# Altium PCB pb-autoreverse.PcbDoc
Units mm, origin at the board's own origin, x right, y up, seen from the top; angles counter-clockwise.
Board outline 57.15 x 52.7 mm, 2 copper layers (Top Layer, Bottom Layer); 18 components, 15 nets, 62 pads, 0 vias.
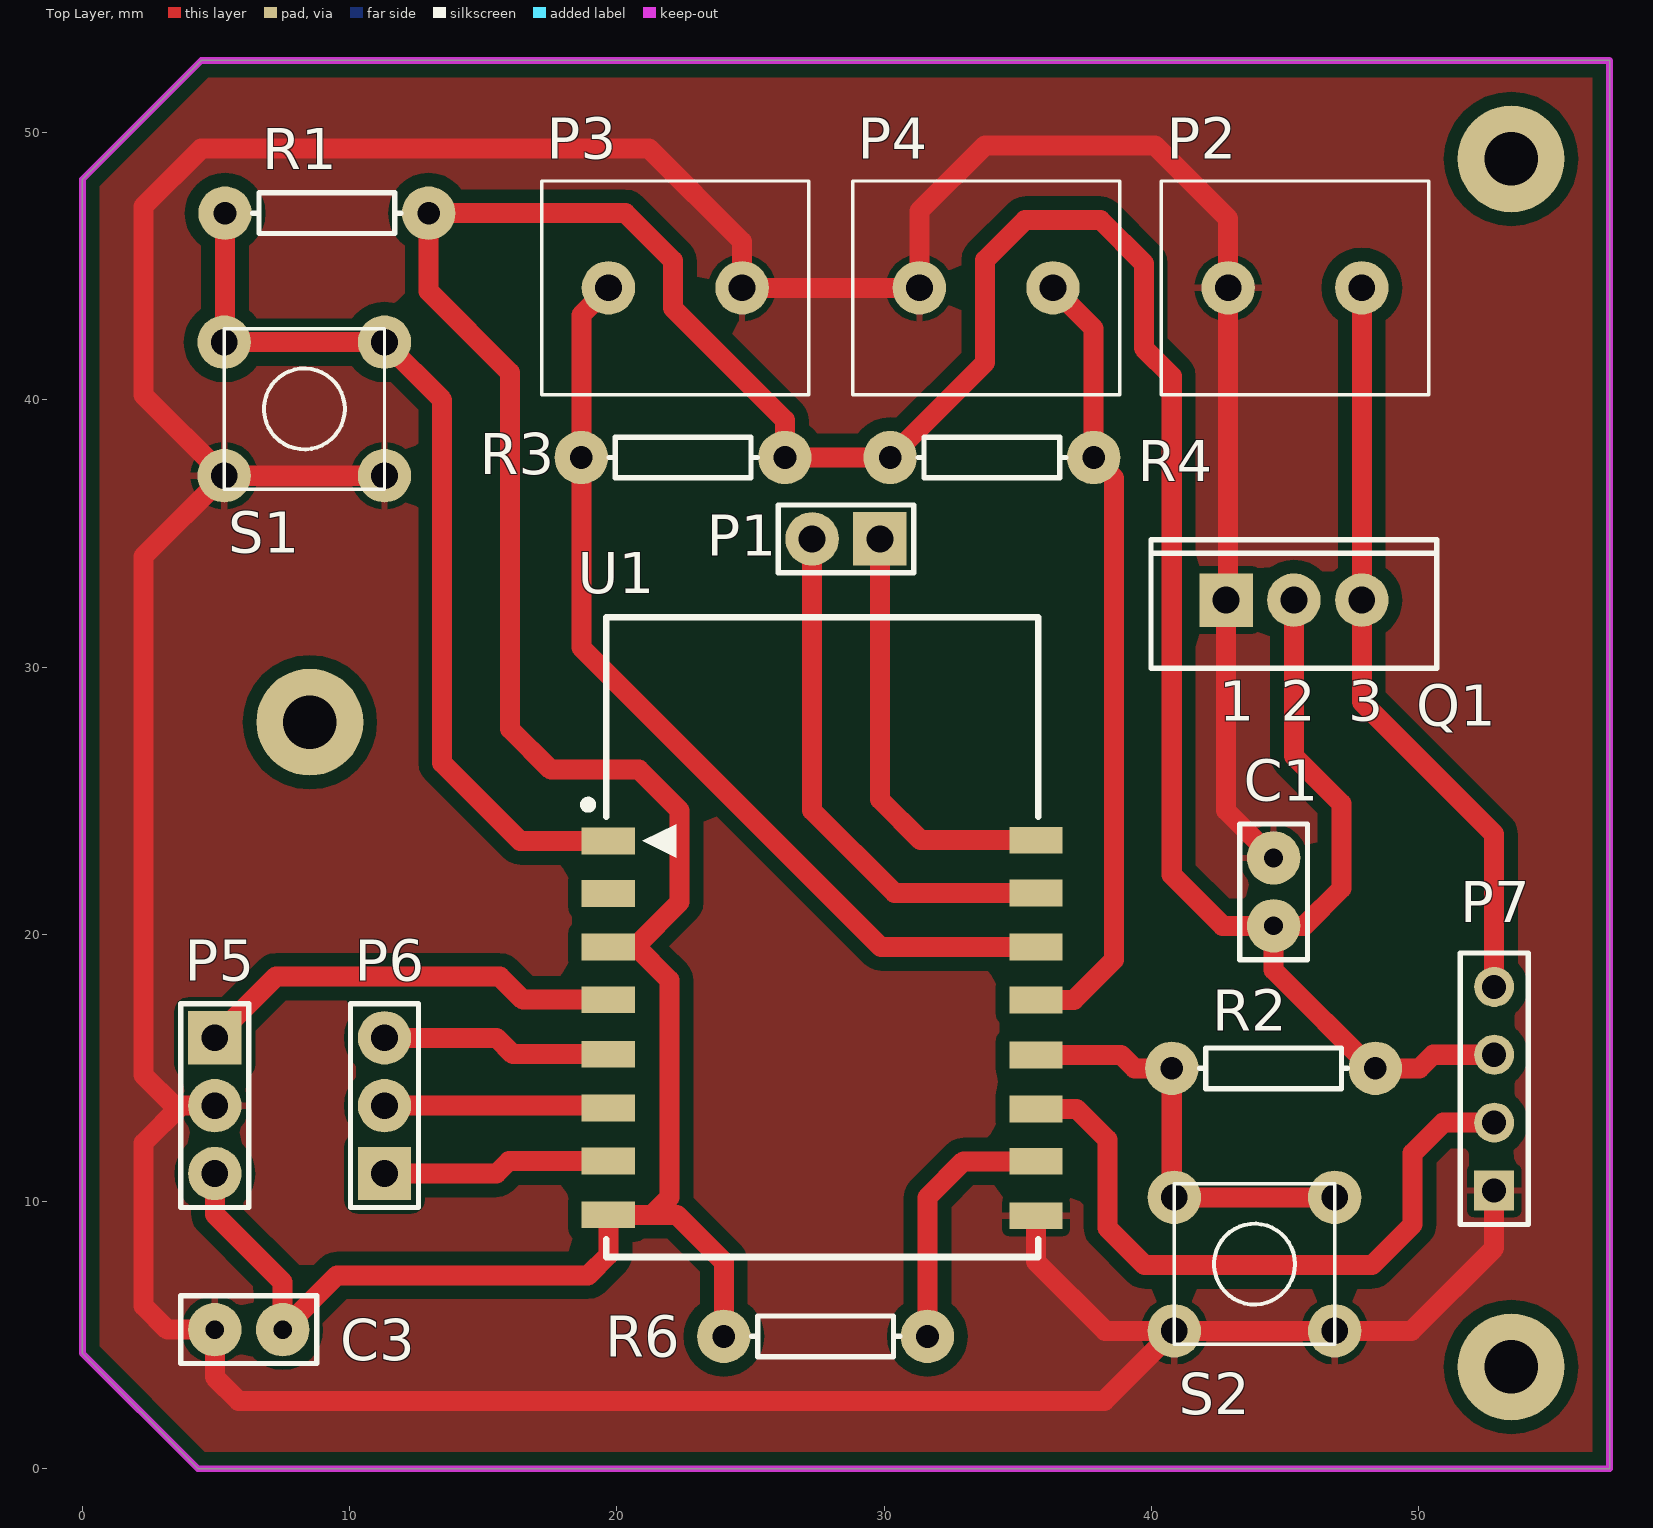
[diagram p0: Top Layer view]
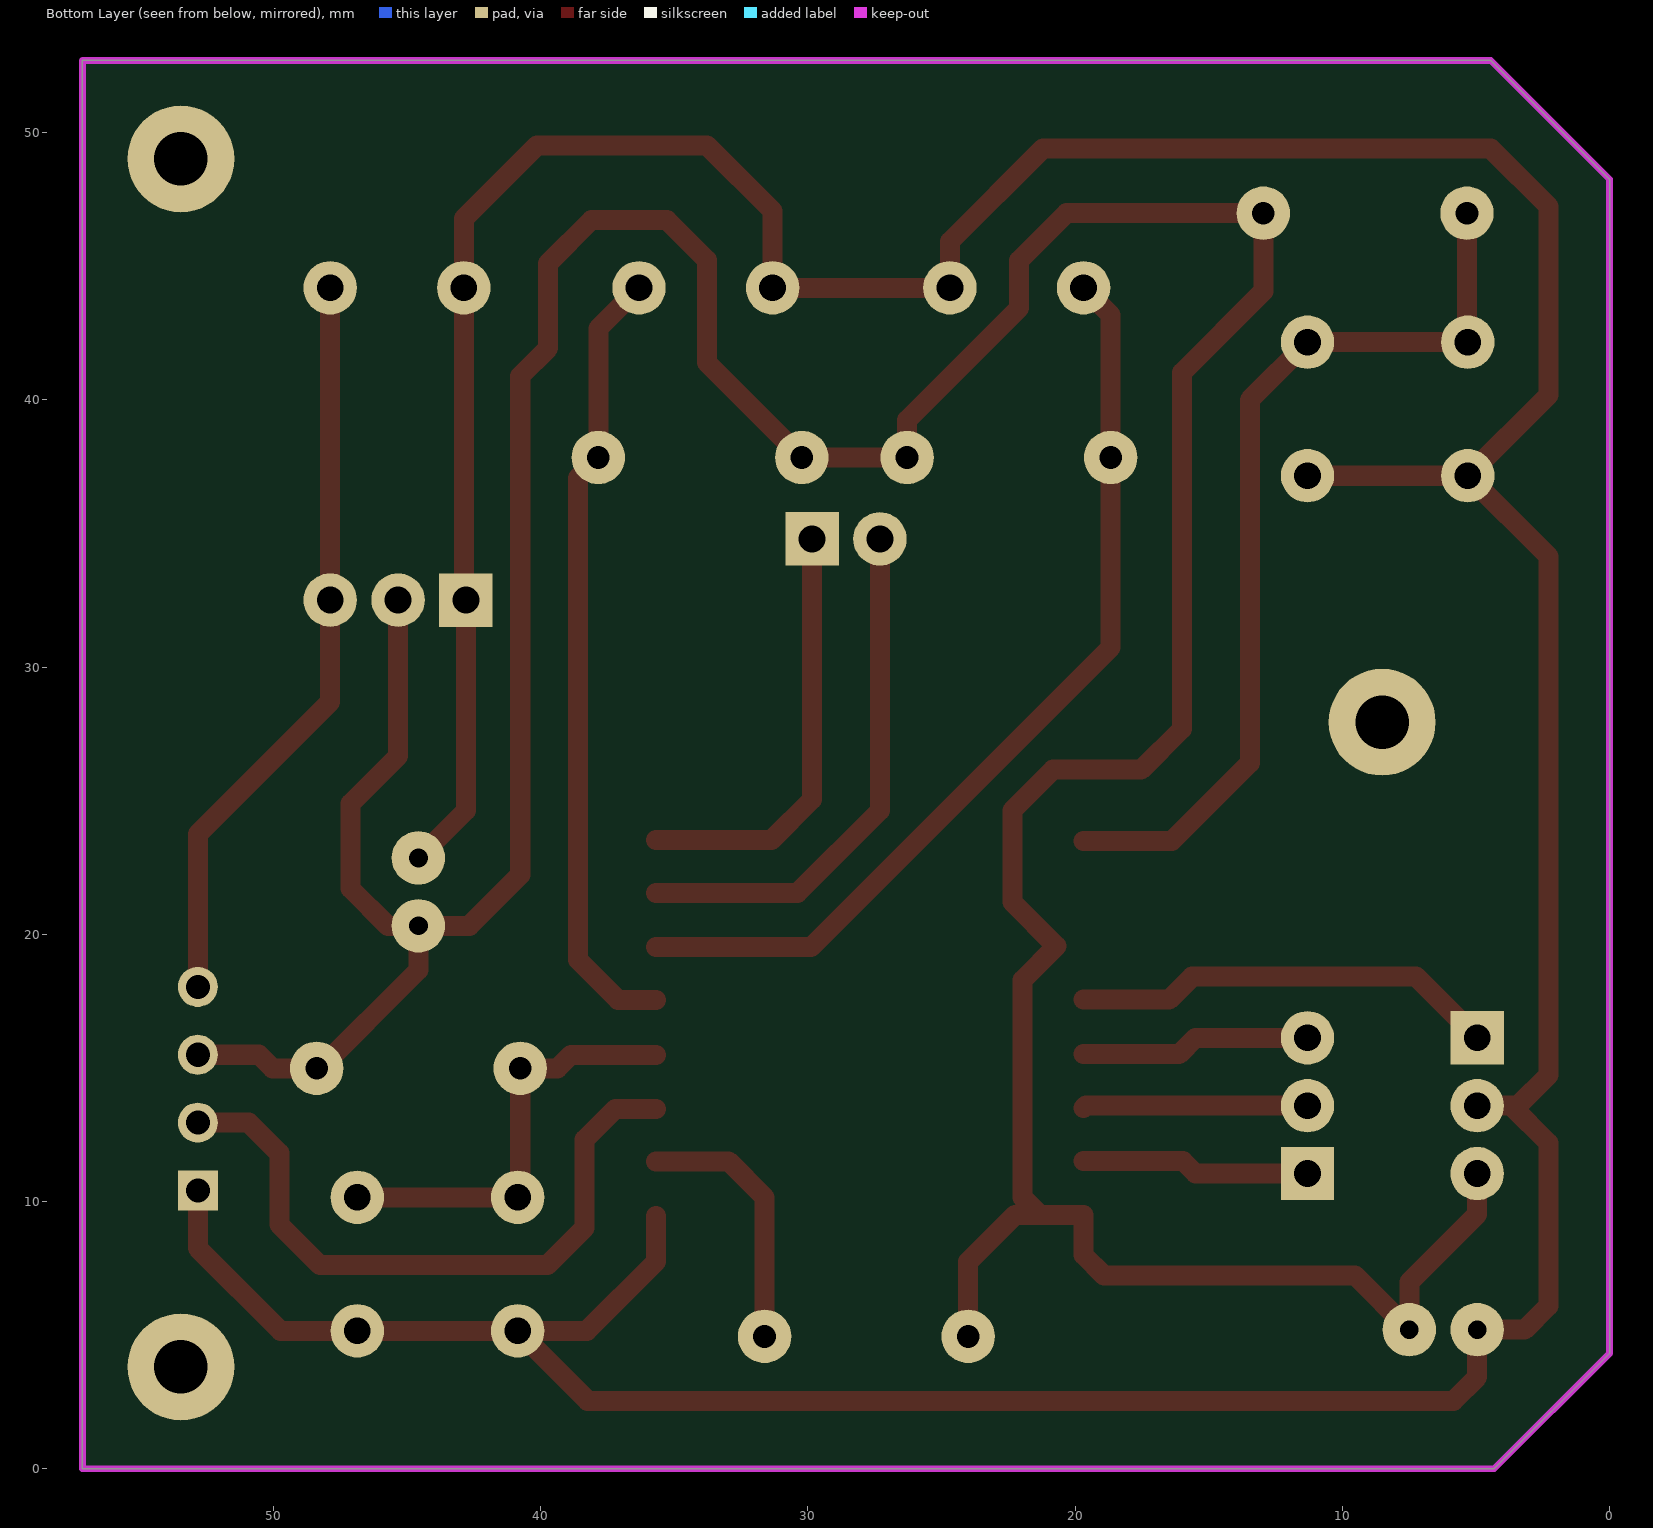
[diagram p1: Bottom Layer view, seen from below]

## Layer stack, top to bottom
Top Solder: solder mask 0.0102, Solder Resist, Dk 3.5
Top Layer: signal copper 0.0356
Dielectric 1: dielectric 0.32, FR-4, Dk 4.8
Bottom Layer: signal copper 0.0356
Bottom Solder: solder mask 0.0102, Solder Resist, Dk 3.5

## Board outline
0,4.318 4.318,0 57.15,0 57.15,52.705 4.445,52.705 0,48.26

## Design rules (kind name [scope] priority, off if disabled: settings)
Clearance [All] p1: gap=0.5 ignorepadtopadclearanceinfootprint=FALSE
PolygonConnect [All] p1: connectstyle=Relief reliefconductorwidth=0.254 reliefentries=4 polygonreliefangle="90 Angle" airgapwidth=0.254
RoutingLayers [All] p1: top layer_v5=TRUE bottom layer_v5=FALSE
RoutingVias [All] p1: holewidth=0.711 width=1.27 viastyle="Through Hole" minholewidth=0.711 minwidth=1.27 maxholewidth=0.711 maxwidth=1.27
SolderMaskExpansion [All] p1: expansion=0.102
Width [All] p1: maxlimit=1 minlimit=0.5 preferedwidth=0.75
29 further rules are at their usual default settings.

## Components (designator, comment, footprint, x,y, rotation, side; value= is the part's Value field where it differs from the comment)
C1 "100nf" RAD-0.1 44.577,21.59 r270 top value=100nF
C3 "100nf" RAD-0.1 6.223,5.207 r180 top value=100nF
P1 "Header 2" HDR1X2 29.845,34.798 r180 top
P2 "Power input" ScrewTerminal-X2 50.379,48.196 r180 top
P3 "Pwr switch" ScrewTerminal-X2 17.185,40.196 r0 top
P4 "Bwd switch" ScrewTerminal-X2 38.822,48.196 r180 top
P5 "Sensor" HDR1X3 4.953,16.129 r270 top
P6 "IO Export" HDR1X3 11.303,11.049 r90 top
P7 "Header 4" HDR1X4 52.832,10.414 r90 top
Q1 "Regulador 3.3V" TO-220-AB 45.339,32.512 r0 top
R1 "10K" AXIAL-0.3 9.144,46.99 r180 top
R2 "10K" AXIAL-0.3 44.577,14.986 r0 top
R3 "10K" AXIAL-0.3 22.479,37.846 r0 top
R4 "10K" AXIAL-0.3 34.036,37.846 r180 top
R6 "10K" AXIAL-0.3 27.813,4.953 r0 top
S1 "RST" PushButton 5.303,42.664 r270 top
S2 "RST" PushButton 46.863,4.66 r90 top
U1 "ESP-12e" ESP_12 19.685,23.495 r0 top

## Footprints (in the part's own frame and the unit in brackets; to place one, negate y for a bottom-side part, rotate by r counter-clockwise, add the part's x,y. Pads: shape width x height; smd on the part's side, far side on the other; paste and mask are expansions set on the pad)
AXIAL-0.3 [mm] "Axial Device, Thru-Hole; 2 Leads; 0.3 in Pin Spacing"
  round 2 hole 0.85: 1(-3.81,0) 2(3.81,0)
  silkscreen extent -2.77,-0.76 2.77,0.76
ESP_12 [mm]
  rect 2x1 smd: 1(0,0) 2(0,-1.97) 3(0,-3.97) 4(0,-5.94) 5(0,-7.98) 6(0,-9.99) 7(0,-11.98) 8(0,-13.99) 9(16,-14.03) 10(16,-11.99) 11(16,-10.03) 12(16,-8.01) 13(16,-5.95) 14(16,-3.97) 15(16,-1.95) 16(16,0.03)
  silkscreen extent -0.91,-15.57 16.08,8.37
HDR1X2 [mm] "Connector; Header; 2 Position"
  rect 2x2 hole 1: 1(0,0)
  round 2 hole 1: 2(2.54,0)
  silkscreen extent -1.27,-1.27 3.81,1.27
HDR1X3 [mm] "Connector; Header; 3 Position"
  rect 2x2 hole 1: 1(0,0)
  round 2 hole 1: 2(2.54,0) 3(5.08,0)
  silkscreen extent -1.27,-1.27 6.35,1.27
HDR1X4 [mm] "Connector; Header; 4 Position"
  rect 1.5x1.5 hole 0.9: 1(0,0)
  round 1.5 hole 0.9: 2(2.54,0) 3(5.08,0) 4(7.62,0)
  silkscreen extent -1.27,-1.27 8.89,1.27
PushButton [mm]
  round 2 hole 1: 1(0.5,6) 2(5.5,6) 3(0.5,0) 4(5.5,0)
  silkscreen extent 0,0 6,6
RAD-0.1 [mm] "Radial Cap, Thru-Hole; 2 Leads; 0.1 in Pin Spacing"
  round 2 hole 0.7: 1(-1.27,0) 2(1.27,0)
  silkscreen extent -2.54,-1.27 2.54,1.27
ScrewTerminal-X2 [mm]
  round 2 hole 1: 1(2.5,4) 2(7.5,4)
  silkscreen extent 0,0 10,8
TO-220-AB [mm] "TO, Thru-Hole, Vertical, Heatsink Mounted; 3 In-Line Leads; Pitch 2.54 mm"
  rect 2x2 hole 1: 1(-2.54,0)
  round 2 hole 1: 2(0,0) 3(2.54,0)
  silkscreen extent -5.35,-2.55 5.35,2.25

## Part data
C1 C3: library part Cap, "Capacitor", LatestRevisionDate=17-Jul-2002, LatestRevisionNote="Re-released for DXP Platform.", PackageDescription="Radial Cap, Thru-Hole; 2 Leads; 0.3 in Pin Spacing", PackageReference=RAD-0.3, Published=8-Jun-2000, Publisher="Altium Limited"
P1: "Header, 2-Pin", LatestRevisionDate=17-Jul-2002, LatestRevisionNote="Re-released for DXP Platform.", Publisher="Altium Limited"
P2 P3 P4: library part ScrewTerminal
P5 P6: library part "Header 3", "Header, 3-Pin", LatestRevisionDate=17-Jul-2002, LatestRevisionNote="Re-released for DXP Platform.", Publisher="Altium Limited"
P7: "Header, 4-Pin", LatestRevisionDate=17-Jul-2002, LatestRevisionNote="Re-released for DXP Platform.", Publisher="Altium Limited"
Q1: library part AMS1117
R1 R2 R3 R4 R6: library part Res1, "Resistor", LatestRevisionDate=17-Jul-2002, LatestRevisionNote="Re-released for DXP Platform.", PackageDescription="Axial Device, Thru-Hole; 2 Leads; 0.3 in Pin Spacing", PackageReference=AXIAL-0.3, Published=8-Jun-2000, Publisher="Altium Limited"
S1 S2: library part IT-2175, "Tactile Switch, DPST; Thru-Hole; Vertical; Rating DC 12V, 50mA (max)", PackageDocument=Rev.0, ComponentLink1Description="Manufacturer Link", ComponentLink1URL=http://www.ilswitch.com/, ComponentLink2Description="Device Overview", ComponentLink2URL=http://www.ilswitch.com/list.php?ac_id=010112&ai_id=91, DatasheetDocument=Rev.0, PackageReference=IT-2175, Published=6-Jun-2005, Publisher="Altium Limited"
U1: library part ESP-12

## Free pads (board coordinates)
  round 4 hole 2: 2(8.509,27.94) 2(53.467,3.81) 2(53.467,49.022)

## Nets (pads, with @x,y where several pads share a name; then routed paths per layer and width w, separated by ;. In a path a pad name is that pad's centre, name@x,y a point inside that pad or via, vN(x,y) a via of type N, cw(c..) or ccw(c..) an arc to the next point about the centre after c; other vN are vias at no path point)
+3.3VDC: C1.2 C3.1 P5.3 P7.3 Q1.2 R1.1 R2.2 R3.2 R4.2 R6.1 U1.3 U1.8 | length 167.7
  Top Layer w0.75: P5.3 4.953,9.525 7.493,6.985 C3.1 9.525,7.239 18.923,7.239 19.685,8.001 U1.8 21.316,9.505 ; R6.1 24.003,7.747 22.245,9.505 21.316,9.505 ; Q1.2 45.339,26.67 47.117,24.892 47.117,21.717 45.72,20.32 C1.2 ; R2.2@48.387,14.859 44.577,18.669 C1.2 ; R2.2 50.038,14.986 50.546,15.494 P7.3 ; 21.316,9.505 21.971,10.16 21.971,18.288 20.701,19.558 22.352,21.209 22.352,24.638 20.828,26.162 17.526,26.162 16.002,27.686 16.002,41.021 12.954,44.069 R1.1 20.32,46.99 22.098,45.212 22.098,43.434 26.289,39.243 R3.2 R4.2 33.782,41.402 33.782,45.236 35.282,46.736 38.1,46.736 39.721,45.115 39.721,41.94 40.767,40.894 40.767,22.225 42.672,20.32 C1.2
+5VDC: P2.1 P7.4 Q1.3 | length 28.2
  Top Layer w0.75: P2.1 Q1.3 47.879,28.702 52.832,23.749 P7.4
GND: C1.1 C3.2 P2.2 P3.2 P4.2 P5.2 P7.1 Q1.1 S1.2 S1.4 S2.1 S2.3 U1.9 | length 192.2
  Top Layer w0.75: P5.2 3.683,13.589 ; S1.2 S1.4 ; U1.9 35.685,7.749 38.274,5.16 S2.1 ; C1.1 42.799,24.638 Q1.1 42.879,32.592 P2.2 42.879,46.783 40.132,49.53 33.782,49.53 31.322,47.07 P4.2 P3.2 24.685,45.927 21.209,49.403 4.445,49.403 2.286,47.244 2.286,40.181 S1.4 ; P7.1 52.832,8.255 49.737,5.16 S2.3 S2.1 ; 3.683,13.589 3.429,13.589 2.286,14.732 2.286,34.147 S1.4 ; 3.683,13.589 2.286,12.192 2.286,6.096 3.175,5.207 C3.2 4.953,3.429 5.842,2.54 38.243,2.54 S2.1
NetP1_1: P1.1 U1.16 | length 16.2
  Top Layer w0.75: P1.1 29.845,25.049 31.369,23.525 U1.16
NetP1_2: P1.2 U1.15 | length 19.8
  Top Layer w0.75: P1.2 27.305,24.638 30.398,21.545 U1.15
NetP3_1: P3.1 R3.1 U1.14 | length 35.5
  Top Layer w0.75: P3.1 18.669,43.18 R3.1 18.669,30.734 29.878,19.525 U1.14
NetP4_1: P4.1 R4.1 U1.13 | length 29.6
  Top Layer w0.75: U1.13 37.103,17.545 38.608,19.05 38.608,37.084 R4.1 37.846,42.672 P4.1
NetP5_1: P5.1 U1.4 | length 16
  Top Layer w0.75: P5.1 7.239,18.415 15.621,18.415 16.481,17.555 U1.4
NetP6_1: P6.1 U1.7 | length 8.6
  Top Layer w0.75: P6.1 15.494,11.049 15.96,11.515 U1.7
NetP6_2: P6.2 U1.6 | length 8.4
  Top Layer w0.75: P6.2 19.601,13.589 U1.6
NetP6_3: P6.3 U1.5 | length 8.6
  Top Layer w0.75: P6.3 15.494,16.129 16.108,15.515 U1.5
NetP7_2: P7.2 U1.11 | length 25.3
  Top Layer w0.75: U1.11 37.208,13.465 38.354,12.319 38.354,9.017 39.751,7.62 48.26,7.62 49.784,9.144 49.784,11.811 50.927,12.954 P7.2
NetR1_2: R1.2 S1.1 S1.3 U1.1 | length 34.9
  Top Layer w0.75: R1.2 5.334,42.195 S1.3 S1.1 13.462,40.005 13.462,26.416 16.383,23.495 U1.1
NetR2_1: R2.1 S2.2 S2.4 U1.12 | length 16.2
  Top Layer w0.75: U1.12 38.871,15.485 39.37,14.986 R2.1 40.767,10.256 S2.2 S2.4
NetR6_2: R6.2 U1.10 | length 9.8
  Top Layer w0.75: R6.2 31.623,10.16 32.968,11.505 U1.10
pads on no net: U1.2

## Polygon pours and split planes (outlines as drawn)
GND on Top Layer "GND" (solid, remove dead copper, pour order 0): 4.445,52.705 57.15,52.705 57.15,0 4.318,0 0,4.318 0,48.26

## Keep-outs
Keep-Out Layer:
  the board outline again, w0.254

## Text inside footprints (layer, text, board x,y; h text height)
Q1: Top Overlay "3" at 47.379,27.987 h1.5; Top Overlay "2" at 44.839,27.987 h1.5; Top Overlay "1" at 42.549,27.987 h1.5
U1: Mechanical 13 "CUTOUT POLYGON" at 19.812,30.861 h0.25; Mechanical 13 "ANTENNA AREA" at 19.812,31.369 h0.25